# Altium PCB pcb.PcbDoc (part 3 of 9)
Units mil, origin at the board's own origin, x right, y up, seen from the top; angles counter-clockwise.
Board outline 3937.01 x 3937.01 mil, 4 copper layers (Top Layer, Ground plane, Power plane, Bottom Layer), stack 51.4 mil thick; 310 components, 276 nets, 1704 pads, 977 vias.
Unrouted connection lines stored in the file: 44.
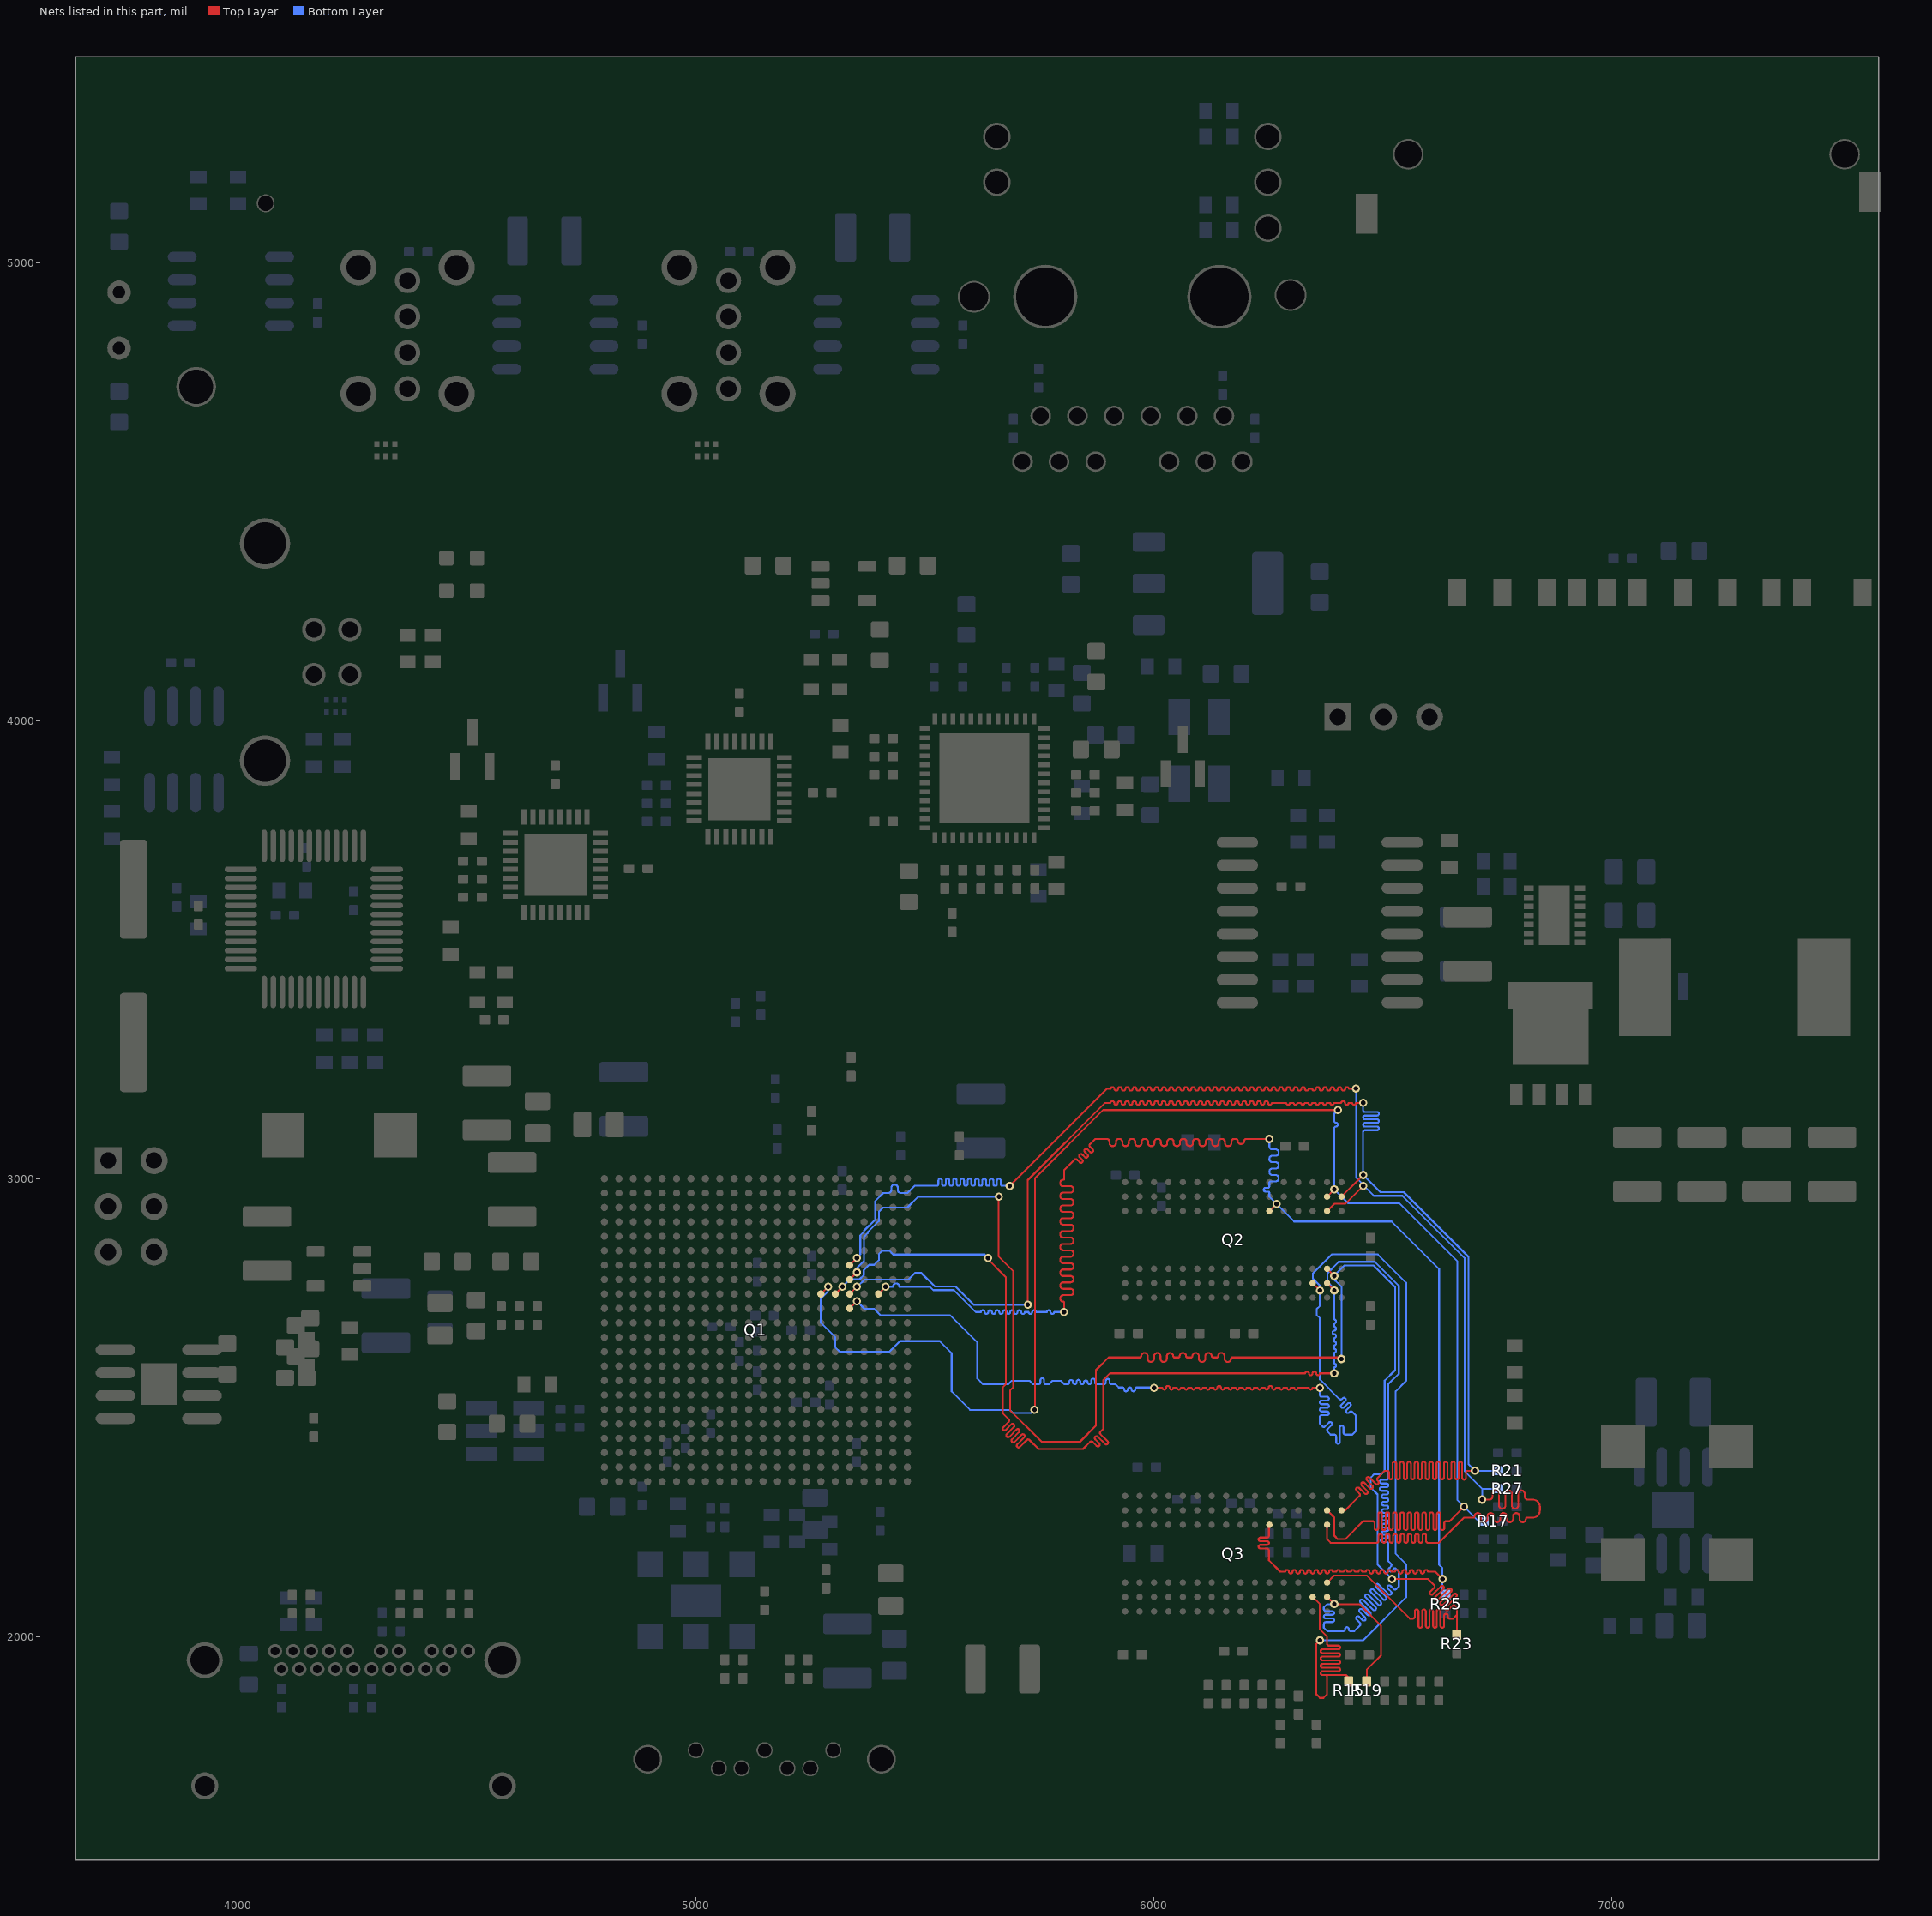
[diagram p4: the nets of this part, all layers, seen from the top]

## Via types
v1: diameter 18, hole 10, Top Layer to Bottom Layer, 932 vias
v2: diameter 19.68, hole 9.84, Top Layer to Bottom Layer, tented both sides, 18 vias
v3: diameter 19.68, hole 9.84, Top Layer to Bottom Layer, 16 vias
v4: diameter 19.68, hole 7.87, Top Layer to Bottom Layer, 11 vias

## Nets (pads, with @x,y where several pads share a name; then routed paths per layer and width w, separated by ;. In a path a pad name is that pad's centre, name@x,y a point inside that pad or via, vN(x,y) a via of type N, cw(c..) or ccw(c..) an arc to the next point about the centre after c; other vN are vias at no path point) (continued)
A5: Q1.K18 Q2.P2 Q3.P2 R15.1 | length 4159.4
  Top Layer w4: Q1.K18@5335.43,2716.54 v1(5351.18,2732.28) ; v1(6000,2543.31) 6018.2,2543.31 ccw(c6022.2,2543.31) 6026.2,2543.31 cw(c6030.2,2543.31) 6034.2,2543.31 ccw(c6038.2,2543.31) 6042.2,2543.31 6050.2,2543.31 ccw(c6054.2,2543.31) 6058.2,2543.31 6066.2,2543.31 ccw(c6070.2,2543.31) 6074.2,2543.31 6082.2,2543.31 ccw(c6086.2,2543.31) 6090.2,2543.31 6098.2,2543.31 ccw(c6102.2,2543.31) 6106.2,2543.31 6114.2,2543.31 ccw(c6118.2,2543.31) 6122.2,2543.31 6130.2,2543.31 ccw(c6134.2,2543.31) 6138.2,2543.31 cw(c6142.2,2543.31) 6146.2,2543.31 ccw(c6150.2,2543.31) 6154.2,2543.31 6162.2,2543.31 ccw(c6166.2,2543.31) 6170.2,2543.31 6178.2,2543.31 ccw(c6182.2,2543.31) 6186.2,2543.31 6194.2,2543.31 ccw(c6198.2,2543.31) 6202.2,2543.31 6210.2,2543.31 ccw(c6214.2,2543.31) 6218.2,2543.31 6226.2,2543.31 ccw(c6230.2,2543.31) 6234.2,2543.31 6242.2,2543.31 ccw(c6246.2,2543.31) 6250.2,2543.31 cw(c6254.2,2543.31) 6258.2,2543.31 ccw(c6262.2,2543.31) 6266.2,2543.31 6274.2,2543.31 ccw(c6278.2,2543.31) 6282.2,2543.31 6290.2,2543.31 ccw(c6294.2,2543.31) 6298.2,2543.31 6306.2,2543.31 ccw(c6310.2,2543.31) 6314.2,2543.31 6338.2,2543.31 ccw(c6342.2,2543.31) 6346.2,2543.31 v1(6362.2,2543.31) ; Q3.P2@6346.46,2086.61 6362.2,2070.87 6362.2,2015.75 6377.95,2000 6377.95,1984.25 ccw(c6381.95,1984.25) 6381.95,1980.25 6402.52,1980.25 cw(c6402.52,1976.25) 6406.52,1976.25 cw(c6402.52,1976.25) 6402.52,1972.25 6367.76,1972.25 ccw(c6367.76,1968.25) 6363.76,1968.25 ccw(c6367.76,1968.25) 6367.76,1964.25 6402.52,1964.25 cw(c6402.52,1960.25) 6406.52,1960.25 cw(c6402.52,1960.25) 6402.52,1956.25 6367.76,1956.25 ccw(c6367.76,1952.25) 6363.76,1952.25 ccw(c6367.76,1952.25) 6367.76,1948.25 6402.52,1948.25 cw(c6402.52,1944.25) 6406.52,1944.25 cw(c6402.52,1944.25) 6402.52,1940.25 6367.76,1940.25 ccw(c6367.76,1936.25) 6363.76,1936.25 ccw(c6367.76,1936.25) 6367.76,1932.25 6402.52,1932.25 cw(c6402.52,1928.25) 6406.52,1928.25 cw(c6402.52,1928.25) 6402.52,1924.25 6367.76,1924.25 ccw(c6367.76,1920.25) 6363.76,1920.25 ccw(c6367.76,1920.25) 6367.76,1916.25 6373.95,1916.25 ; Q2.P2@6346.46,2771.65 v1(6362.2,2755.91) ; v1(6362.2,1992.13) 6354.33,1984.25 6354.33,1874.02 6362.2,1866.14 6370.08,1866.14 6377.95,1874.02 6377.95,1912.25 ccw(c6373.95,1912.25) 6373.95,1916.25 ; R15.1@6433.07,1902.17 6418.98,1916.25 6373.95,1916.25
  Bottom Layer w4: v1(5351.18,2732.28) 5367.68,2715.79 5388.89,2715.79 5403.13,2701.54 5554.86,2701.54 5554.86,2701.28 ; 5555.12,2701.28 5614.05,2642.36 5614.05,2563.62 5626.61,2551.06 5681.45,2551.06 5689.2,2558.8 5728.13,2558.8 5735.88,2551.06 5748.03,2551.06 ccw(c5748.03,2555.06) 5752.03,2555.06 5752.03,2560.21 cw(c5756.03,2560.21) 5756.03,2564.21 cw(c5756.03,2560.21) 5760.03,2560.21 5760.03,2555.06 ccw(c5764.03,2555.06) 5764.03,2551.06 5770.5,2551.06 5777.87,2558.43 5796.93,2558.43 5804.31,2551.06 5811.02,2551.06 ccw(c5811.02,2555.06) 5815.02,2555.06 5815.02,2556.45 cw(c5819.02,2556.45) 5819.02,2560.45 cw(c5819.02,2556.45) 5823.02,2556.45 5823.02,2555.06 ccw(c5827.02,2555.06) 5827.02,2551.06 ccw(c5827.02,2555.06) 5831.02,2555.06 5831.02,2556.7 cw(c5835.02,2556.7) 5835.02,2560.7 cw(c5835.02,2556.7) 5839.02,2556.7 5839.02,2555.06 ccw(c5843.02,2555.06) 5843.02,2551.06 ccw(c5843.02,2555.06) 5847.02,2555.06 5847.02,2555.17 cw(c5851.02,2555.17) 5851.02,2559.17 cw(c5851.02,2555.17) 5855.02,2555.17 5855.02,2555.06 ccw(c5859.02,2555.06) 5859.02,2551.06 ccw(c5859.02,2555.06) 5863.02,2555.06 5863.02,2559.3 cw(c5867.02,2559.3) 5867.02,2563.3 cw(c5867.02,2559.3) 5871.02,2559.3 5871.02,2555.06 ccw(c5875.02,2555.06) 5875.02,2551.06 5891.02,2551.06 ccw(c5891.02,2555.06) 5895.02,2555.06 5895.02,2558.86 cw(c5899.02,2558.86) 5899.02,2562.86 cw(c5899.02,2558.86) 5903.02,2558.86 5903.02,2555.06 ccw(c5907.02,2555.06) 5907.02,2551.06 5915.92,2551.06 5922.92,2544.06 5930.92,2544.06 cw(c5930.92,2540.06) 5934.92,2540.06 5934.92,2539.56 ccw(c5938.92,2539.56) 5938.92,2535.56 ccw(c5938.92,2539.56) 5942.92,2539.56 5942.92,2540.06 cw(c5946.92,2540.06) 5946.92,2544.06 cw(c5946.92,2540.06) 5950.92,2540.06 5950.92,2539.56 ccw(c5954.92,2539.56) 5954.92,2535.56 ccw(c5954.92,2539.56) 5958.92,2539.56 5958.92,2540.06 cw(c5962.92,2540.06) 5962.92,2544.06 v1@5999.25,2544.06 ; v1(6362.2,1992.13) 6456.69,1992.13 6550.69,2086.12 6550.69,2157.98 6527.81,2180.85 6527.81,2535.68 6550.69,2558.56 6550.69,2772.73 6489.01,2834.4 6387.99,2834.4 6347.2,2793.61 6347.2,2781.19 6362.2,2766.19 v1(6362.2,2755.91) 6362.2,2722 6355.08,2714.87 6355.08,2702.45 6362.2,2695.32 6362.2,2561.46 6404.79,2518.88 ccw(c6407.62,2521.71) 6410.44,2518.88 6411.83,2520.27 cw(c6414.66,2517.44) 6417.49,2520.27 cw(c6414.66,2517.44) 6417.49,2514.61 6413.27,2510.4 6409.05,2506.18 ccw(c6411.88,2503.35) 6409.05,2500.52 ccw(c6411.88,2503.35) 6414.71,2500.52 6418.93,2504.74 6423.15,2508.96 cw(c6425.97,2506.13) 6428.8,2508.96 cw(c6425.97,2506.13) 6428.8,2503.3 6424.59,2499.08 6420.37,2494.87 ccw(c6423.2,2492.04) 6420.37,2489.21 ccw(c6423.2,2492.04) 6426.03,2489.21 6427.41,2490.6 cw(c6430.24,2487.77) 6433.07,2490.6 6440.94,2482.72 6440.94,2448.82 6433.07,2440.94 6417.83,2440.94 cw(c6417.83,2444.94) 6413.83,2444.94 6413.83,2456.8 ccw(c6409.83,2456.8) 6409.83,2460.8 ccw(c6409.83,2456.8) 6405.83,2456.8 6405.83,2425.09 cw(c6401.83,2425.09) 6401.83,2421.09 cw(c6401.83,2425.09) 6397.83,2425.09 6397.83,2436.94 ccw(c6393.83,2436.94) 6393.83,2440.94 6385.83,2440.94 6379.18,2447.6 cw(c6382,2450.42) 6379.18,2453.25 6387.56,2461.64 ccw(c6384.73,2464.47) 6387.56,2467.29 ccw(c6384.73,2464.47) 6381.9,2467.29 6373.52,2458.91 cw(c6370.69,2461.74) 6367.86,2458.91 6362.2,2464.57 6362.2,2479.56 cw(c6366.2,2479.56) 6366.2,2483.56 6378.06,2483.56 ccw(c6378.06,2487.56) 6382.06,2487.56 ccw(c6378.06,2487.56) 6378.06,2491.56 6366.2,2491.56 cw(c6366.2,2495.56) 6362.2,2495.56 cw(c6366.2,2495.56) 6366.2,2499.56 6378.06,2499.56 ccw(c6378.06,2503.56) 6382.06,2503.56 ccw(c6378.06,2503.56) 6378.06,2507.56 6366.2,2507.56 cw(c6366.2,2511.56) 6362.2,2511.56 cw(c6366.2,2511.56) 6366.2,2515.56 6378.06,2515.56 ccw(c6378.06,2519.56) 6382.06,2519.56 ccw(c6378.06,2519.56) 6378.06,2523.56 6366.2,2523.56 cw(c6366.2,2527.56) 6362.2,2527.56 v1(6362.2,2543.31)
A6: Q1.J16 Q2.R8 Q3.R8 R17.1 | length 4150.3
  Top Layer w4: Q1.J16@5272.44,2748.03 v1(5288.19,2763.78) ; v1(5739.15,2495.06) 5740.16,2496.06 5740.16,3000.99 5888.77,3149.61 v1(6401.57,3149.61) ; Q3.R8@6377.95,2275.59 6393.7,2259.84 6393.7,2220.47 6401.32,2212.85 6417.32,2212.85 6456.44,2251.97 6477.8,2251.97 cw(c6477.8,2247.97) 6481.8,2247.97 6481.8,2236.68 ccw(c6485.8,2236.68) 6485.8,2232.68 ccw(c6485.8,2236.68) 6489.8,2236.68 6489.8,2267.26 cw(c6493.8,2267.26) 6493.8,2271.26 cw(c6493.8,2267.26) 6497.8,2267.26 6497.8,2236.68 ccw(c6501.8,2236.68) 6501.8,2232.68 ccw(c6501.8,2236.68) 6505.8,2236.68 6505.8,2267.26 cw(c6509.8,2267.26) 6509.8,2271.26 cw(c6509.8,2267.26) 6513.8,2267.26 6513.8,2236.68 ccw(c6517.8,2236.68) 6517.8,2232.68 ccw(c6517.8,2236.68) 6521.8,2236.68 6521.8,2267.26 cw(c6525.8,2267.26) 6525.8,2271.26 cw(c6525.8,2267.26) 6529.8,2267.26 6529.8,2236.68 ccw(c6533.8,2236.68) 6533.8,2232.68 ccw(c6533.8,2236.68) 6537.8,2236.68 6537.8,2267.26 cw(c6541.8,2267.26) 6541.8,2271.26 cw(c6541.8,2267.26) 6545.8,2267.26 6545.8,2236.68 ccw(c6549.8,2236.68) 6549.8,2232.68 ccw(c6549.8,2236.68) 6553.8,2236.68 6553.8,2267.26 cw(c6557.8,2267.26) 6557.8,2271.26 cw(c6557.8,2267.26) 6561.8,2267.26 6561.8,2236.68 ccw(c6565.8,2236.68) 6565.8,2232.68 ccw(c6565.8,2236.68) 6569.8,2236.68 6569.8,2267.26 cw(c6573.8,2267.26) 6573.8,2271.26 cw(c6573.8,2267.26) 6577.8,2267.26 6577.8,2236.68 ccw(c6581.8,2236.68) 6581.8,2232.68 ccw(c6581.8,2236.68) 6585.8,2236.68 6585.8,2267.26 cw(c6589.8,2267.26) 6589.8,2271.26 cw(c6589.8,2267.26) 6593.8,2267.26 6593.8,2236.68 ccw(c6597.8,2236.68) 6597.8,2232.68 ccw(c6597.8,2236.68) 6601.8,2236.68 6601.8,2267.26 cw(c6605.8,2267.26) 6605.8,2271.26 cw(c6605.8,2267.26) 6609.8,2267.26 6609.8,2236.68 ccw(c6613.8,2236.68) 6613.8,2232.68 ccw(c6613.8,2236.68) 6617.8,2236.68 6617.8,2267.26 cw(c6621.8,2267.26) 6621.8,2271.26 cw(c6621.8,2267.26) 6625.8,2267.26 6625.8,2236.68 ccw(c6629.8,2236.68) 6629.8,2232.68 ccw(c6629.8,2236.68) 6633.8,2236.68 6633.8,2247.97 cw(c6637.8,2247.97) 6637.8,2251.97 6645.67,2251.97 v1(6677.17,2283.46) ; Q2.R8@6377.95,2960.63 v1(6393.7,2976.38)
  Bottom Layer w4: v1(5288.19,2763.78) 5288.19,2753.5 5272.44,2737.75 5272.44,2685.04 5304.13,2653.35 5304.13,2631.35 5313.43,2622.05 5422.05,2622.05 5445.17,2645.17 5532.04,2645.17 5558.05,2619.16 5558.05,2535.45 5598.44,2495.06 5685.02,2495.06 5691.88,2488.19 5732.28,2488.19 v1(5739.15,2495.06) ; v1(6401.57,3149.61) 6393.7,3141.73 6393.7,3125.98 ccw(c6397.7,3125.98) 6397.7,3121.98 cw(c6397.7,3117.98) 6401.7,3117.98 cw(c6397.7,3117.98) 6397.7,3113.98 ccw(c6397.7,3109.98) 6393.7,3109.98 v1(6393.7,2976.38) 6423.68,2946.4 6535.4,2946.4 6662.69,2819.12 6662.69,2297.95 v1(6677.17,2283.46) 6708.66,2251.97 R17.1@6719.88,2251.97
A7: Q1.J17 Q2.R2 Q3.R2 R19.1 | length 4350.9
  Top Layer w4: Q1.J17@5303.94,2748.03 v1(5319.69,2763.78) ; v1(5637.8,2826.77) 5637.8,2823.74 5676.66,2784.87 5676.66,2551.18 5669.66,2544.18 5669.66,2487.78 5682.79,2474.66 cw(c5679.96,2471.83) 5682.79,2469 5670.83,2457.05 ccw(c5673.66,2454.22) 5670.83,2451.39 ccw(c5673.66,2454.22) 5676.49,2451.39 5688.44,2463.34 cw(c5691.27,2460.52) 5694.1,2463.34 cw(c5691.27,2460.52) 5694.1,2457.69 5678.54,2442.13 ccw(c5681.37,2439.3) 5678.54,2436.47 ccw(c5681.37,2439.3) 5684.2,2436.47 5699.76,2452.03 cw(c5702.58,2449.2) 5705.41,2452.03 cw(c5702.58,2449.2) 5705.41,2446.37 5689.86,2430.82 ccw(c5692.69,2427.99) 5689.86,2425.16 ccw(c5692.69,2427.99) 5695.51,2425.16 5711.07,2440.72 cw(c5713.9,2437.89) 5716.73,2440.72 cw(c5713.9,2437.89) 5716.73,2435.06 5701.36,2419.69 ccw(c5704.19,2416.87) 5701.36,2414.04 ccw(c5704.19,2416.87) 5707.02,2414.04 5722.38,2429.4 cw(c5725.21,2426.57) 5728.04,2429.4 5747.87,2409.57 5845.09,2409.57 5860.48,2424.97 cw(c5863.31,2422.14) 5866.14,2424.97 5874.63,2416.48 ccw(c5877.46,2419.31) 5880.28,2416.48 ccw(c5877.46,2419.31) 5880.28,2422.14 5871.8,2430.63 cw(c5874.63,2433.45) 5871.8,2436.28 cw(c5874.63,2433.45) 5877.46,2436.28 5893.01,2420.73 ccw(c5895.84,2423.55) 5898.67,2420.73 ccw(c5895.84,2423.55) 5898.67,2426.38 5883.11,2441.94 cw(c5885.94,2444.77) 5883.11,2447.6 5889.27,2453.75 5889.27,2560.25 5903.82,2574.8 6330.2,2574.8 cw(c6334.2,2574.8) 6338.2,2574.8 ccw(c6342.2,2574.8) 6346.2,2574.8 cw(c6350.2,2574.8) 6354.2,2574.8 ccw(c6358.2,2574.8) 6362.2,2574.8 v1(6393.7,2574.8) ; Q3.R2@6377.95,2086.61 v1(6393.7,2070.87) 6448.82,2070.87 6496.06,2023.62 6496.06,1959.2 6464.57,1927.71 R19.1@6464.57,1902.17 ; Q2.R2@6377.95,2771.65 v1(6393.7,2755.91)
  Bottom Layer w4: v1(5319.69,2763.78) 5336.18,2780.28 5357.39,2780.28 5366.18,2789.06 5366.18,2799.99 5377.96,2811.77 5388.89,2811.77 5399.17,2822.05 5399.17,2835.39 5406.3,2842.52 5422.05,2842.52 5430.43,2834.14 5630.43,2834.14 v1(5637.8,2826.77) ; v1(6393.7,2070.87) 6377.95,2070.87 6370.86,2063.78 6370.86,2059.72 ccw(c6374.86,2059.72) 6374.86,2055.72 6389.32,2055.72 cw(c6389.32,2051.72) 6393.32,2051.72 cw(c6389.32,2051.72) 6389.32,2047.72 6374.86,2047.72 ccw(c6374.86,2043.72) 6370.86,2043.72 ccw(c6374.86,2043.72) 6374.86,2039.72 6389.32,2039.72 cw(c6389.32,2035.72) 6393.32,2035.72 cw(c6389.32,2035.72) 6389.32,2031.72 6374.86,2031.72 ccw(c6374.86,2027.72) 6370.86,2027.72 6370.86,2019.72 6378.46,2012.12 6413.32,2012.12 ccw(c6413.32,2016.12) 6417.32,2016.12 6417.32,2016.66 cw(c6421.32,2016.66) 6421.32,2020.66 cw(c6421.32,2016.66) 6425.32,2016.66 6425.32,2016.12 ccw(c6429.32,2016.12) 6429.32,2012.12 6437.32,2012.12 6449.83,2024.64 ccw(c6447,2027.46) 6449.83,2030.29 6442.42,2037.71 cw(c6445.25,2040.53) 6442.42,2043.36 cw(c6445.25,2040.53) 6448.08,2043.36 6455.49,2035.95 ccw(c6458.32,2038.78) 6461.15,2035.95 ccw(c6458.32,2038.78) 6461.15,2041.61 6449.2,2053.55 cw(c6452.03,2056.38) 6449.2,2059.21 cw(c6452.03,2056.38) 6454.86,2059.21 6466.8,2047.26 ccw(c6469.63,2050.09) 6472.46,2047.26 ccw(c6469.63,2050.09) 6472.46,2052.92 6451.01,2074.37 cw(c6453.84,2077.19) 6451.01,2080.02 cw(c6453.84,2077.19) 6456.67,2080.02 6478.12,2058.58 ccw(c6480.94,2061.4) 6483.77,2058.58 ccw(c6480.94,2061.4) 6483.77,2064.23 6462.39,2085.62 cw(c6465.21,2088.45) 6462.39,2091.28 cw(c6465.21,2088.45) 6468.04,2091.28 6489.43,2069.89 ccw(c6492.26,2072.72) 6495.09,2069.89 ccw(c6492.26,2072.72) 6495.09,2075.55 6473.7,2096.93 cw(c6476.53,2099.76) 6473.7,2102.59 cw(c6476.53,2099.76) 6479.36,2102.59 6500.74,2081.2 ccw(c6503.57,2084.03) 6506.4,2081.2 ccw(c6503.57,2084.03) 6506.4,2086.86 6485.01,2108.25 cw(c6487.84,2111.08) 6485.01,2113.91 cw(c6487.84,2111.08) 6490.67,2113.91 6512.06,2092.52 ccw(c6514.89,2095.35) 6517.71,2092.52 ccw(c6514.89,2095.35) 6517.71,2098.17 6510.71,2105.18 cw(c6513.54,2108.01) 6510.71,2110.84 cw(c6513.54,2108.01) 6516.37,2110.84 6523.37,2103.83 ccw(c6526.2,2106.66) 6529.03,2103.83 6534.69,2109.49 6534.69,2141.73 6527.56,2148.86 ccw(c6525.95,2147.25) 6524.35,2148.86 6519.06,2143.57 cw(c6516.23,2146.4) 6513.41,2143.57 cw(c6516.23,2146.4) 6513.41,2149.23 6517.47,2153.29 ccw(c6514.64,2156.12) 6517.47,2158.95 6511.81,2164.61 6511.81,2202.33 ccw(c6507.81,2202.33) 6507.81,2206.33 6499.23,2206.33 cw(c6499.23,2210.33) 6495.23,2210.33 cw(c6499.23,2210.33) 6499.23,2214.33 6507.81,2214.33 ccw(c6507.81,2218.33) 6511.81,2218.33 ccw(c6507.81,2218.33) 6507.81,2222.33 6501.45,2222.33 cw(c6501.45,2226.33) 6497.45,2226.33 cw(c6501.45,2226.33) 6501.45,2230.33 6507.81,2230.33 ccw(c6507.81,2234.33) 6511.81,2234.33 ccw(c6507.81,2234.33) 6507.81,2238.33 6501.45,2238.33 cw(c6501.45,2242.33) 6497.45,2242.33 cw(c6501.45,2242.33) 6501.45,2246.33 6507.81,2246.33 ccw(c6507.81,2250.33) 6511.81,2250.33 ccw(c6507.81,2250.33) 6507.81,2254.33 6501.45,2254.33 cw(c6501.45,2258.33) 6497.45,2258.33 cw(c6501.45,2258.33) 6501.45,2262.33 6507.81,2262.33 ccw(c6507.81,2266.33) 6511.81,2266.33 ccw(c6507.81,2266.33) 6507.81,2270.33 6501.45,2270.33 cw(c6501.45,2274.33) 6497.45,2274.33 cw(c6501.45,2274.33) 6501.45,2278.33 6507.81,2278.33 ccw(c6507.81,2282.33) 6511.81,2282.33 ccw(c6507.81,2282.33) 6507.81,2286.33 6501.45,2286.33 cw(c6501.45,2290.33) 6497.45,2290.33 cw(c6501.45,2290.33) 6501.45,2294.33 6507.81,2294.33 ccw(c6507.81,2298.33) 6511.81,2298.33 ccw(c6507.81,2298.33) 6507.81,2302.33 6501.45,2302.33 cw(c6501.45,2306.33) 6497.45,2306.33 cw(c6501.45,2306.33) 6501.45,2310.33 6507.81,2310.33 ccw(c6507.81,2314.33) 6511.81,2314.33 ccw(c6507.81,2314.33) 6507.81,2318.33 6497.07,2318.33 cw(c6497.07,2322.33) 6493.07,2322.33 cw(c6497.07,2322.33) 6497.07,2326.33 6507.81,2326.33 ccw(c6507.81,2330.33) 6511.81,2330.33 ccw(c6507.81,2330.33) 6507.81,2334.33 6497.07,2334.33 cw(c6497.07,2338.33) 6493.07,2338.33 cw(c6497.07,2338.33) 6497.07,2342.33 6507.81,2342.33 ccw(c6507.81,2346.33) 6511.81,2346.33 6511.81,2551.18 6534.69,2574.06 6534.69,2766.1 6482.38,2818.4 6403.49,2818.4 6378.7,2793.61 6378.7,2774.35 6393.7,2759.35 v1(6393.7,2755.91) 6393.7,2692.16 cw(c6393.7,2688.16) 6393.7,2684.16 6393.7,2676.16 cw(c6393.7,2672.16) 6393.7,2668.16 ccw(c6393.7,2664.16) 6393.7,2660.16 cw(c6393.7,2656.16) 6393.7,2652.16 6393.7,2644.16 cw(c6393.7,2640.16) 6393.7,2636.16 6393.7,2628.16 cw(c6393.7,2624.16) 6393.7,2620.16 6393.7,2596.16 cw(c6393.7,2592.16) 6393.7,2588.16 v1(6393.7,2574.8)
A8: Q1.J18 Q2.T8 Q3.T8 R21.1 | length 4178.5
  Top Layer w4: Q1.J18@5335.43,2748.03 v1(5351.18,2763.78) ; v1(5724.41,2724.41) 5724.41,2996.56 5893.2,3165.35 5905.07,3165.35 cw(c5909.07,3165.35) 5913.07,3165.35 ccw(c5917.07,3165.35) 5921.07,3165.35 cw(c5925.07,3165.35) 5929.07,3165.35 ccw(c5933.07,3165.35) 5937.07,3165.35 cw(c5941.07,3165.35) 5945.07,3165.35 ccw(c5949.07,3165.35) 5953.07,3165.35 cw(c5957.07,3165.35) 5961.07,3165.35 ccw(c5965.07,3165.35) 5969.07,3165.35 cw(c5973.07,3165.35) 5977.07,3165.35 ccw(c5981.07,3165.35) 5985.07,3165.35 cw(c5989.07,3165.35) 5993.07,3165.35 ccw(c5997.07,3165.35) 6001.07,3165.35 cw(c6005.07,3165.35) 6009.07,3165.35 ccw(c6013.07,3165.35) 6017.07,3165.35 cw(c6021.07,3165.35) 6025.07,3165.35 ccw(c6029.07,3165.35) 6033.07,3165.35 cw(c6037.07,3165.35) 6041.07,3165.35 ccw(c6045.07,3165.35) 6049.07,3165.35 cw(c6053.07,3165.35) 6057.07,3165.35 ccw(c6061.07,3165.35) 6065.07,3165.35 cw(c6069.07,3165.35) 6073.07,3165.35 ccw(c6077.07,3165.35) 6081.07,3165.35 cw(c6085.07,3165.35) 6089.07,3165.35 ccw(c6093.07,3165.35) 6097.07,3165.35 cw(c6101.07,3165.35) 6105.07,3165.35 ccw(c6109.07,3165.35) 6113.07,3165.35 cw(c6117.07,3165.35) 6121.07,3165.35 ccw(c6125.07,3165.35) 6129.07,3165.35 cw(c6133.07,3165.35) 6137.07,3165.35 ccw(c6141.07,3165.35) 6145.07,3165.35 cw(c6149.07,3165.35) 6153.07,3165.35 ccw(c6157.07,3165.35) 6161.07,3165.35 cw(c6165.07,3165.35) 6169.07,3165.35 ccw(c6173.07,3165.35) 6177.07,3165.35 cw(c6181.07,3165.35) 6185.07,3165.35 ccw(c6189.07,3165.35) 6193.07,3165.35 cw(c6197.07,3165.35) 6201.07,3165.35 ccw(c6205.07,3165.35) 6209.07,3165.35 cw(c6213.07,3165.35) 6217.07,3165.35 ccw(c6221.07,3165.35) 6225.07,3165.35 cw(c6229.07,3165.35) 6233.07,3165.35 ccw(c6237.07,3165.35) 6241.07,3165.35 cw(c6245.07,3165.35) 6249.07,3165.35 ccw(c6253.07,3165.35) 6257.07,3165.35 6288.94,3165.35 ccw(c6292.94,3165.35) 6296.94,3165.35 6304.94,3165.35 ccw(c6308.94,3165.35) 6312.94,3165.35 6320.94,3165.35 ccw(c6324.94,3165.35) 6328.94,3165.35 6336.94,3165.35 ccw(c6340.94,3165.35) 6344.94,3165.35 6352.94,3165.35 ccw(c6356.94,3165.35) 6360.94,3165.35 6368.94,3165.35 ccw(c6372.94,3165.35) 6376.94,3165.35 6384.94,3165.35 ccw(c6388.94,3165.35) 6392.94,3165.35 6408.94,3165.35 cw(c6412.94,3165.35) 6416.94,3165.35 ccw(c6420.94,3165.35) 6424.94,3165.35 6432.94,3165.35 ccw(c6436.94,3165.35) 6440.94,3165.35 v1(6456.69,3165.35) ; Q3.T8@6409.45,2275.59 6417.32,2275.59 6448.59,2306.86 ccw(c6445.76,2309.69) 6448.59,2312.52 6442.26,2318.84 cw(c6445.09,2321.67) 6442.26,2324.5 cw(c6445.09,2321.67) 6447.92,2324.5 6459.9,2312.52 ccw(c6462.73,2315.34) 6465.56,2312.52 ccw(c6462.73,2315.34) 6465.56,2318.17 6462.73,2321 6453.58,2330.16 cw(c6456.4,2332.99) 6453.58,2335.81 cw(c6456.4,2332.99) 6459.23,2335.81 6468.39,2326.66 6471.22,2323.83 ccw(c6474.05,2326.66) 6476.88,2323.83 ccw(c6474.05,2326.66) 6476.88,2329.49 6474.05,2332.31 6464.89,2341.47 cw(c6467.72,2344.3) 6464.89,2347.13 cw(c6467.72,2344.3) 6470.55,2347.13 6479.7,2337.97 6484.01,2333.66 ccw(c6486.84,2336.49) 6489.67,2333.66 ccw(c6486.84,2336.49) 6489.67,2339.32 6488.19,2340.8 cw(c6491.02,2343.63) 6488.19,2346.46 6503.94,2362.2 6509.04,2362.2 cw(c6509.04,2358.2) 6513.04,2358.2 6513.04,2347.5 ccw(c6517.04,2347.5) 6517.04,2343.5 ccw(c6517.04,2347.5) 6521.04,2347.5 6521.04,2377.64 cw(c6525.04,2377.64) 6525.04,2381.64 cw(c6525.04,2377.64) 6529.04,2377.64 6529.04,2347.5 ccw(c6533.04,2347.5) 6533.04,2343.5 ccw(c6533.04,2347.5) 6537.04,2347.5 6537.04,2377.64 cw(c6541.04,2377.64) 6541.04,2381.64 cw(c6541.04,2377.64) 6545.04,2377.64 6545.04,2347.5 ccw(c6549.04,2347.5) 6549.04,2343.5 ccw(c6549.04,2347.5) 6553.04,2347.5 6553.04,2377.64 cw(c6557.04,2377.64) 6557.04,2381.64 cw(c6557.04,2377.64) 6561.04,2377.64 6561.04,2347.5 ccw(c6565.04,2347.5) 6565.04,2343.5 ccw(c6565.04,2347.5) 6569.04,2347.5 6569.04,2377.64 cw(c6573.04,2377.64) 6573.04,2381.64 cw(c6573.04,2377.64) 6577.04,2377.64 6577.04,2347.5 ccw(c6581.04,2347.5) 6581.04,2343.5 ccw(c6581.04,2347.5) 6585.04,2347.5 6585.04,2377.64 cw(c6589.04,2377.64) 6589.04,2381.64 cw(c6589.04,2377.64) 6593.04,2377.64 6593.04,2347.5 ccw(c6597.04,2347.5) 6597.04,2343.5 ccw(c6597.04,2347.5) 6601.04,2347.5 6601.04,2377.64 cw(c6605.04,2377.64) 6605.04,2381.64 cw(c6605.04,2377.64) 6609.04,2377.64 6609.04,2347.5 ccw(c6613.04,2347.5) 6613.04,2343.5 ccw(c6613.04,2347.5) 6617.04,2347.5 6617.04,2377.64 cw(c6621.04,2377.64) 6621.04,2381.64 cw(c6621.04,2377.64) 6625.04,2377.64 6625.04,2347.5 ccw(c6629.04,2347.5) 6629.04,2343.5 ccw(c6629.04,2347.5) 6633.04,2347.5 6633.04,2377.64 cw(c6637.04,2377.64) 6637.04,2381.64 cw(c6637.04,2377.64) 6641.04,2377.64 6641.04,2347.5 ccw(c6645.04,2347.5) 6645.04,2343.5 ccw(c6645.04,2347.5) 6649.04,2347.5 6649.04,2377.64 cw(c6653.04,2377.64) 6653.04,2381.64 cw(c6653.04,2377.64) 6657.04,2377.64 6657.04,2347.5 ccw(c6661.04,2347.5) 6661.04,2343.5 ccw(c6661.04,2347.5) 6665.04,2347.5 6665.04,2377.64 cw(c6669.04,2377.64) 6669.04,2381.64 cw(c6669.04,2377.64) 6673.04,2377.64 6673.04,2346.77 ccw(c6677.04,2346.77) 6677.04,2342.77 ccw(c6677.04,2346.77) 6681.04,2346.77 6681.04,2358.2 cw(c6685.04,2358.2) 6685.04,2362.2 v1(6700.79,2362.2) ; Q2.T8@6409.45,2960.63 6448.82,3000 v1(6456.69,3007.87)
  Bottom Layer w4: v1(5351.18,2763.78) 5352.21,2763.78 5367.96,2779.53 5463.83,2779.53 5478.83,2794.53 5491.25,2794.53 5521.38,2764.4 5566.31,2764.4 5606.3,2724.41 v1(5724.41,2724.41) ; v1(6456.69,3165.35) 6456.69,3149.61 ccw(c6460.69,3149.61) 6460.69,3145.61 6487.03,3145.61 cw(c6487.03,3141.61) 6491.03,3141.61 cw(c6487.03,3141.61) 6487.03,3137.61 6460.69,3137.61 ccw(c6460.69,3133.61) 6456.69,3133.61 ccw(c6460.69,3133.61) 6460.69,3129.61 6487.03,3129.61 cw(c6487.03,3125.61) 6491.03,3125.61 cw(c6487.03,3125.61) 6487.03,3121.61 6460.69,3121.61 ccw(c6460.69,3117.61) 6456.69,3117.61 ccw(c6460.69,3117.61) 6460.69,3113.61 6487.03,3113.61 cw(c6487.03,3109.61) 6491.03,3109.61 cw(c6487.03,3109.61) 6487.03,3105.61 6460.69,3105.61 ccw(c6460.69,3101.61) 6456.69,3101.61 v1(6456.69,3007.87) 6494.17,2970.4 6545.34,2970.4 6686.69,2829.06 6686.69,2376.31 v1(6700.79,2362.2) R21.1@6751.38,2362.2
A9: Q1.H18 Q2.R3 Q3.R3 R23.1 | length 4136.7
  Top Layer w4: Q1.H18@5335.43,2779.53 v1(5351.18,2795.28) ; v1(5661.42,2960.63) 5660.8,2960.01 5660.8,2829.8 5692.66,2797.94 5692.66,2544.55 5685.66,2537.55 5685.66,2494.41 5754.5,2425.57 5838.46,2425.57 5873.27,2460.38 5873.27,2581.8 5900.94,2609.48 5969.01,2609.48 ccw(c5969.01,2612.48) 5972.01,2612.48 cw(c5979.01,2612.48) 5979.01,2619.48 cw(c5979.01,2612.48) 5986.01,2612.48 5986.01,2606.68 ccw(c5993.01,2606.68) 5993.01,2599.68 ccw(c5993.01,2606.68) 6000.01,2606.68 6000.01,2612.28 cw(c6007.01,2612.28) 6007.01,2619.28 cw(c6007.01,2612.28) 6014.01,2612.28 6014.01,2606.68 ccw(c6021.01,2606.68) 6021.01,2599.68 ccw(c6021.01,2606.68) 6028.01,2606.68 6028.01,2612.28 cw(c6035.01,2612.28) 6035.01,2619.28 cw(c6035.01,2612.28) 6042.01,2612.28 ; 6042.01,2612.48 ccw(c6045.01,2612.48) 6045.01,2609.48 6053.01,2609.48 ccw(c6053.01,2612.48) 6056.01,2612.48 cw(c6063.01,2612.48) 6063.01,2619.48 cw(c6063.01,2612.48) 6070.01,2612.48 ccw(c6073.01,2612.48) 6073.01,2609.48 6081.01,2609.48 ccw(c6081.01,2612.48) 6084.01,2612.48 cw(c6091.01,2612.48) 6091.01,2619.48 cw(c6091.01,2612.48) 6098.01,2612.48 6098.01,2606.68 ccw(c6105.01,2606.68) 6105.01,2599.68 ccw(c6105.01,2606.68) 6112.01,2606.68 6112.01,2612.28 cw(c6119.01,2612.28) 6119.01,2619.28 cw(c6119.01,2612.28) 6126.01,2612.38 ; 6126.01,2612.28 ccw(c6119.01,2612.28) 6126.01,2612.38 ; 6126.01,2612.48 ccw(c6129.01,2612.48) 6126.01,2612.38 ; 6168.01,2606.48 cw(c6171.01,2606.48) 6168.01,2606.58 ; 6168.01,2606.68 cw(c6161.01,2606.68) 6168.01,2606.58 ; Q3.R3@6377.95,2118.11 6393.58,2133.73 ; Q2.R3@6377.95,2803.15 v1(6393.7,2787.4) ; 6393.7,2133.73 6464.69,2133.73 6559.06,2039.37 6565.54,2039.37 ccw(c6565.54,2043.37) 6569.54,2043.37 6569.54,2055.36 cw(c6573.54,2055.36) 6573.54,2059.36 cw(c6573.54,2055.36) 6577.54,2055.36 6577.54,2023.38 ccw(c6581.54,2023.38) 6581.54,2019.38 ccw(c6581.54,2023.38) 6585.54,2023.38 6585.54,2055.36 cw(c6589.54,2055.36) 6589.54,2059.36 cw(c6589.54,2055.36) 6593.54,2055.36 6593.54,2023.38 ccw(c6597.54,2023.38) 6597.54,2019.38 ccw(c6597.54,2023.38) 6601.54,2023.38 6601.54,2055.36 cw(c6605.54,2055.36) 6605.54,2059.36 cw(c6605.54,2055.36) 6609.54,2055.36 6609.54,2023.38 ccw(c6613.54,2023.38) 6613.54,2019.38 ccw(c6613.54,2023.38) 6617.54,2023.38 6617.54,2055.36 cw(c6621.54,2055.36) 6621.54,2059.36 cw(c6621.54,2055.36) 6625.54,2055.36 6625.54,2023.38 ccw(c6629.54,2023.38) 6629.54,2019.38 ccw(c6629.54,2023.38) 6633.54,2023.38 6633.54,2045.76 cw(c6637.54,2045.76) 6637.54,2049.76 cw(c6637.54,2045.76) 6641.54,2045.76 6641.54,2043.37 ccw(c6645.54,2043.37) 6645.54,2039.37 6653.54,2039.37 6661.42,2047.24 ; v1(6409.45,2606.3) 6406.27,2609.48 6171.01,2609.48 ccw(c6171.01,2606.48) 6168.01,2606.58 ; v1(6519.69,2125.98) 6598.43,2125.98 6611.96,2112.45 cw(c6609.13,2109.62) 6611.96,2106.8 6603.48,2098.32 ccw(c6606.31,2095.49) 6603.48,2092.66 ccw(c6606.31,2095.49) 6609.14,2092.66 6626.29,2109.82 cw(c6629.12,2106.99) 6631.95,2109.82 cw(c6629.12,2106.99) 6631.95,2104.16 6614.79,2087.01 ccw(c6617.62,2084.18) 6614.79,2081.35 ccw(c6617.62,2084.18) 6620.45,2081.35 6631.76,2092.65 6643.06,2103.96 cw(c6645.89,2101.13) 6648.72,2103.96 cw(c6645.89,2101.13) 6648.72,2098.3 6626.11,2075.69 ccw(c6628.94,2072.87) 6626.11,2070.04 ccw(c6628.94,2072.87) 6631.76,2070.04 6643.07,2081.34 6654.37,2092.64 cw(c6657.2,2089.82) 6660.03,2092.64 cw(c6657.2,2089.82) 6660.03,2086.99 6637.42,2064.38 ccw(c6640.25,2061.55) 6637.42,2058.72 ccw(c6640.25,2061.55) 6643.08,2058.72 6651.55,2067.2 cw(c6654.38,2064.37) 6657.21,2067.2 6661.42,2062.99 6661.42,2047.24 ; R23.1@6661.42,2004.53 6661.42,2047.24 ; 6126.01,2612.38 ccw(c6129.01,2612.48) 6129.01,2609.48 6137.01,2609.48 ccw(c6137.01,2612.48) 6140.01,2612.48 cw(c6147.01,2612.48) 6147.01,2619.48 cw(c6147.01,2612.48) 6154.01,2612.48 6154.01,2606.68 ccw(c6161.01,2606.68) 6161.01,2599.68 ccw(c6161.01,2606.68) 6168.01,2606.58
  Bottom Layer w4: v1(5351.18,2795.28) 5351.18,2804.77 5366.74,2820.33 5366.74,2872.8 5374.68,2880.73 5374.68,2882.79 5399.17,2907.29 5399.17,2927.47 5408.52,2936.82 5461.23,2936.82 5484.91,2960.5 5661.29,2960.5 v1(5661.42,2960.63) ; v1(6409.45,2606.3) 6409.45,2763.78 6401.57,2771.65 6393.7,2779.53 v1(6393.7,2787.4) 6393.7,2788.43 6415.67,2810.4 6479.07,2810.4 6526.69,2762.78 6526.69,2581.8 6503.81,2558.93 6503.81,2362.2 6495.94,2354.33 6480.31,2354.33 6473.48,2347.5 6473.48,2324.98 6488.19,2310.27 6488.19,2157.48 v1(6519.69,2125.98)
A10: Q1.J20 Q2.L7 Q3.L7 R25.1 | length 4132.6
  Top Layer w4: Q1.J20@5398.43,2748.03 v1(5414.17,2763.78) ; v1@5804.14,2709.66 5804.14,2728.97 ccw(c5801.7,2728.97) 5801.7,2731.41 cw(c5801.7,2737.71) 5795.4,2737.71 5795.4,2739.11 cw(c5801.7,2739.11) 5801.7,2745.41 5817.84,2745.41 ccw(c5817.84,2751.71) 5824.14,2751.71 5824.14,2753.11 ccw(c5817.84,2753.11) 5817.84,2759.41 5801.7,2759.41 cw(c5801.7,2765.71) 5795.4,2765.71 5795.4,2767.11 cw(c5801.7,2767.11) 5801.7,2773.41 5817.84,2773.41 ccw(c5817.84,2779.71) 5824.14,2779.71 5824.14,2781.11 ccw(c5817.84,2781.11) 5817.84,2787.41 5801.7,2787.41 cw(c5801.7,2793.71) 5795.4,2793.71 5795.4,2795.11 cw(c5801.7,2795.11) 5801.7,2801.41 5817.84,2801.41 ccw(c5817.84,2807.71) 5824.14,2807.71 5824.14,2809.11 ccw(c5817.84,2809.11) 5817.84,2815.41 5801.7,2815.41 cw(c5801.7,2821.71) 5795.4,2821.71 5795.4,2823.11 cw(c5801.7,2823.11) 5801.7,2829.41 5817.84,2829.41 ccw(c5817.84,2835.71) 5824.14,2835.71 5824.14,2837.11 ccw(c5817.84,2837.11) 5817.84,2843.41 5801.7,2843.41 cw(c5801.7,2849.71) 5795.4,2849.71 5795.4,2851.11 cw(c5801.7,2851.11) 5801.7,2857.41 5817.84,2857.41 ccw(c5817.84,2863.71) 5824.14,2863.71 5824.14,2865.11 ccw(c5817.84,2865.11) 5817.84,2871.41 5801.7,2871.41 cw(c5801.7,2877.71) 5795.4,2877.71 5795.4,2879.11 cw(c5801.7,2879.11) 5801.7,2885.41 5817.84,2885.41 ccw(c5817.84,2891.71) 5824.14,2891.71 5824.14,2893.11 ccw(c5817.84,2893.11) 5817.84,2899.41 5801.7,2899.41 cw(c5801.7,2905.71) 5795.4,2905.71 5795.4,2907.11 cw(c5801.7,2907.11) 5801.7,2913.41 5817.84,2913.41 ccw(c5817.84,2919.71) 5824.14,2919.71 5824.14,2921.11 ccw(c5817.84,2921.11) 5817.84,2927.41 5801.7,2927.41 cw(c5801.7,2933.71) 5795.4,2933.71 5795.4,2935.11 cw(c5801.7,2935.11) 5801.7,2941.41 5817.84,2941.41 ccw(c5817.84,2947.71) 5824.14,2947.71 5824.14,2949.11 ccw(c5817.84,2949.11) 5817.84,2955.41 5801.7,2955.41 cw(c5801.7,2961.71) 5795.4,2961.71 5795.4,2963.11 cw(c5801.7,2963.11) 5801.7,2969.41 5817.84,2969.41 ccw(c5817.84,2975.71) 5824.14,2975.71 5824.14,2977.11 ccw(c5817.84,2977.11) 5817.84,2983.41 5801.7,2983.41 cw(c5801.7,2989.71) 5795.4,2989.71 5795.4,2991.11 cw(c5801.7,2991.11) 5801.7,2997.41 ccw(c5801.7,2999.85) 5804.14,2999.85 5804.14,3019.19 5826.32,3041.36 cw(c5829.14,3038.53) 5831.97,3041.36 5837.78,3035.55 ccw(c5840.61,3038.38) 5843.44,3035.55 ccw(c5840.61,3038.38) 5843.44,3041.21 5837.63,3047.02 cw(c5840.46,3049.84) 5837.63,3052.67 cw(c5840.46,3049.84) 5843.29,3052.67 5849.1,3046.86 ccw(c5851.92,3049.69) 5854.75,3046.86 ccw(c5851.92,3049.69) 5854.75,3052.52 5848.94,3058.33 cw(c5851.77,3061.16) 5848.94,3063.99 cw(c5851.77,3061.16) 5854.6,3063.99 5860.41,3058.18 ccw(c5863.24,3061.01) 5866.07,3058.18 ccw(c5863.24,3061.01) 5866.07,3063.84 5860.26,3069.64 cw(c5863.09,3072.47) 5860.26,3075.3 5871.57,3086.61 5896.59,3086.61 cw(c5896.59,3080.31) 5902.89,3080.31 5902.89,3077.42 ccw(c5909.19,3077.42) 5909.19,3071.12 5910.59,3071.12 ccw(c5910.59,3077.42) 5916.89,3077.42 5916.89,3080.31 cw(c5923.19,3080.31) 5923.19,3086.61 5924.59,3086.61 cw(c5924.59,3080.31) 5930.89,3080.31 5930.89,3077.42 ccw(c5937.19,3077.42) 5937.19,3071.12 5938.59,3071.12 ccw(c5938.59,3077.42) 5944.89,3077.42 5944.89,3080.31 cw(c5951.19,3080.31) 5951.19,3086.61 5952.59,3086.61 cw(c5952.59,3080.31) 5958.89,3080.31 5958.89,3077.42 ccw(c5965.19,3077.42) 5965.19,3071.12 5966.59,3071.12 ccw(c5966.59,3077.42) 5972.89,3077.42 5972.89,3080.31 cw(c5979.19,3080.31) 5979.19,3086.61 5980.59,3086.61 cw(c5980.59,3080.31) 5986.89,3080.31 5986.89,3077.42 ccw(c5993.19,3077.42) 5993.19,3071.12 5994.59,3071.12 ccw(c5994.59,3077.42) 6000.89,3077.42 6000.89,3080.31 cw(c6007.19,3080.31) 6007.19,3086.61 6008.59,3086.61 cw(c6008.59,3080.31) 6014.89,3080.31 6014.89,3077.42 ccw(c6021.19,3077.42) 6021.19,3071.12 6022.59,3071.12 ccw(c6022.59,3077.42) 6028.89,3077.42 6028.89,3080.31 cw(c6035.19,3080.31) 6035.19,3086.61 6036.59,3086.61 cw(c6036.59,3080.31) 6042.89,3080.31 6042.89,3077.42 ccw(c6049.19,3077.42) 6049.19,3071.12 6050.59,3071.12 ccw(c6050.59,3077.42) 6056.89,3077.42 6056.89,3080.31 cw(c6063.19,3080.31) 6063.19,3086.61 6064.59,3086.61 cw(c6064.59,3080.31) 6070.89,3080.31 6070.89,3077.42 ccw(c6077.19,3077.42) 6077.19,3071.12 6078.59,3071.12 ccw(c6078.59,3077.42) 6084.89,3077.42 6084.89,3080.31 cw(c6091.19,3080.31) 6091.19,3086.61 6092.59,3086.61 cw(c6092.59,3080.31) 6098.89,3080.31 6098.89,3077.42 ccw(c6105.19,3077.42) 6105.19,3071.12 6106.59,3071.12 ccw(c6106.59,3077.42) 6112.89,3077.42 6112.89,3080.31 cw(c6119.19,3080.31) 6119.19,3086.61 6120.59,3086.61 cw(c6120.59,3080.31) 6126.89,3080.31 6126.89,3077.42 ccw(c6133.19,3077.42) 6133.19,3071.12 6134.59,3071.12 ccw(c6134.59,3077.42) 6140.89,3077.42 6140.89,3080.31 cw(c6147.19,3080.31) 6147.19,3086.61 6148.59,3086.61 cw(c6148.59,3080.31) 6154.89,3080.31 6154.89,3077.42 ccw(c6161.19,3077.42) 6161.19,3071.12 6162.59,3071.12 ccw(c6162.59,3077.42) 6168.89,3077.42 6168.89,3080.31 cw(c6175.19,3080.31) 6175.19,3086.61 6178.3,3086.61 cw(c6178.3,3082.02) 6182.89,3082.02 ccw(c6189.19,3082.02) 6189.19,3075.72 6190.59,3075.72 ccw(c6190.59,3082.02) 6196.89,3082.02 cw(c6201.48,3082.02) 6201.48,3086.61 v1(6251.97,3086.61) ; Q3.L7@6251.97,2244.09 6250.98,2243.1 6250.98,2220.35 cw(c6246.98,2220.35) 6246.98,2216.35 6232.34,2216.35 ccw(c6232.34,2212.35) 6228.34,2212.35 ccw(c6232.34,2212.35) 6232.34,2208.35 6246.98,2208.35 cw(c6246.98,2204.35) 6250.98,2204.35 cw(c6246.98,2204.35) 6246.98,2200.35 6232.34,2200.35 ccw(c6232.34,2196.35) 6228.34,2196.35 ccw(c6232.34,2196.35) 6232.34,2192.35 6246.98,2192.35 cw(c6246.98,2188.35) 6250.98,2188.35 6250.98,2166.34 6275.59,2141.73 6286.43,2141.73 cw(c6290.43,2141.73) 6294.43,2141.73 ccw(c6298.43,2141.73) 6302.43,2141.73 cw(c6306.43,2141.73) 6310.43,2141.73 ccw(c6314.43,2141.73) 6318.43,2141.73 cw(c6322.43,2141.73) 6326.43,2141.73 ccw(c6330.43,2141.73) 6334.43,2141.73 cw(c6338.43,2141.73) 6342.43,2141.73 ccw(c6346.43,2141.73) 6350.43,2141.73 cw(c6354.43,2141.73) 6358.43,2141.73 ccw(c6362.43,2141.73) 6366.43,2141.73 cw(c6370.43,2141.73) 6374.43,2141.73 ccw(c6378.43,2141.73) 6382.43,2141.73 cw(c6386.43,2141.73) 6390.43,2141.73 6398.43,2141.73 cw(c6402.43,2141.73) 6406.43,2141.73 6414.43,2141.73 cw(c6418.43,2141.73) 6422.43,2141.73 6430.43,2141.73 cw(c6434.43,2141.73) 6438.43,2141.73 6446.43,2141.73 cw(c6450.43,2141.73) 6454.43,2141.73 6462.43,2141.73 cw(c6466.43,2141.73) 6470.43,2141.73 ccw(c6474.43,2141.73) 6478.43,2141.73 cw(c6482.43,2141.73) 6486.43,2141.73 ccw(c6490.43,2141.73) 6494.43,2141.73 cw(c6498.43,2141.73) 6502.43,2141.73 ccw(c6506.43,2141.73) 6510.43,2141.73 cw(c6514.43,2141.73) 6518.43,2141.73 6526.43,2141.73 cw(c6530.43,2141.73) 6534.43,2141.73 ccw(c6538.43,2141.73) 6542.43,2141.73 cw(c6546.43,2141.73) 6550.43,2141.73 ccw(c6554.43,2141.73) 6558.43,2141.73 cw(c6562.43,2141.73) 6566.43,2141.73 ccw(c6570.43,2141.73) 6574.43,2141.73 cw(c6578.43,2141.73) 6582.43,2141.73 ccw(c6586.43,2141.73) 6590.43,2141.73 cw(c6594.43,2141.73) 6598.43,2141.73 6614.17,2141.73 v1(6629.92,2125.98) ; Q2.L7@6251.97,2929.13 v1(6267.72,2944.88)
  Bottom Layer w4: v1(5414.17,2763.78) 5414.43,2764.03 5429.92,2764.03 cw(c5436.92,2764.03) 5443.92,2764.03 5510.43,2764.03 5518.06,2756.4 5562.99,2756.4 5610.73,2708.66 5622.05,2708.66 cw(c5626.05,2708.66) 5630.05,2708.66 ccw(c5634.05,2708.66) 5638.05,2708.66 cw(c5642.05,2708.66) 5646.05,2708.66 ccw(c5650.05,2708.66) 5654.05,2708.66 cw(c5658.05,2708.66) 5662.05,2708.66 ccw(c5666.05,2708.66) 5670.05,2708.66 cw(c5674.05,2708.66) 5678.05,2708.66 ccw(c5682.05,2708.66) 5686.05,2708.66 cw(c5690.05,2708.66) 5694.05,2708.66 ccw(c5698.05,2708.66) 5702.05,2708.66 cw(c5706.05,2708.66) 5710.05,2708.66 ccw(c5714.05,2708.66) 5718.05,2708.66 5726.05,2708.66 ccw(c5730.05,2708.66) 5734.05,2708.66 cw(c5738.05,2708.66) 5742.05,2708.66 5766.05,2708.66 cw(c5770.05,2708.66) 5774.05,2708.66 ccw(c5778.05,2708.66) 5782.05,2708.66 v1(5803.15,2708.66) ; v1(6251.97,3086.61) 6251.97,3070.17 ccw(c6258.27,3070.17) 6258.27,3063.87 6265.67,3063.87 cw(c6265.67,3057.57) 6271.97,3057.57 6271.97,3056.17 cw(c6265.67,3056.17) 6265.67,3049.87 6258.27,3049.87 ccw(c6258.27,3043.57) 6251.97,3043.57 6251.97,3042.17 ccw(c6258.27,3042.17) 6258.27,3035.87 6265.67,3035.87 cw(c6265.67,3029.57) 6271.97,3029.57 6271.97,3028.17 cw(c6265.67,3028.17) 6265.67,3021.87 6258.27,3021.87 ccw(c6258.27,3015.57) 6251.97,3015.57 6251.97,3014.17 ccw(c6258.27,3014.17) 6258.27,3007.87 6265.67,3007.87 cw(c6265.67,3001.57) 6271.97,3001.57 6271.97,3000.17 cw(c6265.67,3000.17) 6265.67,2993.87 6254.15,2993.87 6251.97,2991.68 6251.97,2983.68 cw(c6247.97,2983.68) 6247.97,2979.68 6243.42,2979.68 ccw(c6243.42,2975.68) 6239.42,2975.68 ccw(c6243.42,2975.68) 6243.42,2971.68 6248.79,2971.68 cw(c6248.79,2968.5) 6251.97,2968.5 6251.97,2960.63 v1(6267.72,2944.88) 6306.2,2906.4 6518.83,2906.4 6622.69,2802.55 6622.69,2156.84 6629.92,2149.61 v1(6629.92,2125.98) 6629.92,2099.02 R25.1@6637.8,2091.14
A11: Q1.G18 Q2.R7 Q3.R7 R27.1 | length 4208.3
  Top Layer w4: Q1.G18@5335.43,2811.02 v1(5351.18,2826.77) ; v1(5685.04,2984.25) 5896.89,3196.1 5905.51,3196.1 cw(c5909.51,3196.1) 5913.51,3196.1 ccw(c5917.51,3196.1) 5921.51,3196.1 cw(c5925.51,3196.1) 5929.51,3196.1 ccw(c5933.51,3196.1) 5937.51,3196.1 cw(c5941.51,3196.1) 5945.51,3196.1 ccw(c5949.51,3196.1) 5953.51,3196.1 cw(c5957.51,3196.1) 5961.51,3196.1 ccw(c5965.51,3196.1) 5969.51,3196.1 cw(c5973.51,3196.1) 5977.51,3196.1 ccw(c5981.51,3196.1) 5985.51,3196.1 cw(c5989.51,3196.1) 5993.51,3196.1 ccw(c5997.51,3196.1) 6001.51,3196.1 cw(c6005.51,3196.1) 6009.51,3196.1 ccw(c6013.51,3196.1) 6017.51,3196.1 cw(c6021.51,3196.1) 6025.51,3196.1 ccw(c6029.51,3196.1) 6033.51,3196.1 cw(c6037.51,3196.1) 6041.51,3196.1 ccw(c6045.51,3196.1) 6049.51,3196.1 cw(c6053.51,3196.1) 6057.51,3196.1 ccw(c6061.51,3196.1) 6065.51,3196.1 cw(c6069.51,3196.1) 6073.51,3196.1 ccw(c6077.51,3196.1) 6081.51,3196.1 cw(c6085.51,3196.1) 6089.51,3196.1 ccw(c6093.51,3196.1) 6097.51,3196.1 cw(c6101.51,3196.1) 6105.51,3196.1 ccw(c6109.51,3196.1) 6113.51,3196.1 cw(c6117.51,3196.1) 6121.51,3196.1 ccw(c6125.51,3196.1) 6129.51,3196.1 cw(c6133.51,3196.1) 6137.51,3196.1 ccw(c6141.51,3196.1) 6145.51,3196.1 cw(c6149.51,3196.1) 6153.51,3196.1 ccw(c6157.51,3196.1) 6161.51,3196.1 cw(c6165.51,3196.1) 6169.51,3196.1 ccw(c6173.51,3196.1) 6177.51,3196.1 cw(c6181.51,3196.1) 6185.51,3196.1 ccw(c6189.51,3196.1) 6193.51,3196.1 cw(c6197.51,3196.1) 6201.51,3196.1 ccw(c6205.51,3196.1) 6209.51,3196.1 cw(c6213.51,3196.1) 6217.51,3196.1 ccw(c6221.51,3196.1) 6225.51,3196.1 cw(c6229.51,3196.1) 6233.51,3196.1 ccw(c6237.51,3196.1) 6241.51,3196.1 cw(c6245.51,3196.1) 6249.51,3196.1 ccw(c6253.51,3196.1) 6257.51,3196.1 cw(c6261.51,3196.1) 6265.51,3196.1 ccw(c6269.51,3196.1) 6273.51,3196.1 cw(c6277.51,3196.1) 6281.51,3196.1 ccw(c6285.51,3196.1) 6289.51,3196.1 cw(c6293.51,3196.1) 6297.51,3196.1 ccw(c6301.51,3196.1) 6305.51,3196.1 cw(c6309.51,3196.1) 6313.51,3196.1 ccw(c6317.51,3196.1) 6321.51,3196.1 cw(c6325.51,3196.1) 6329.51,3196.1 ccw(c6333.51,3196.1) 6337.51,3196.1 6345.51,3196.1 ccw(c6349.51,3196.1) 6353.51,3196.1 cw(c6357.51,3196.1) 6361.51,3196.1 ccw(c6365.51,3196.1) 6369.51,3196.1 cw(c6373.51,3196.1) 6377.51,3196.1 ccw(c6381.51,3196.1) 6385.51,3196.1 cw(c6389.51,3196.1) 6393.51,3196.1 ccw(c6397.51,3196.1) 6401.51,3196.1 cw(c6405.51,3196.1) 6409.51,3196.1 ccw(c6413.51,3196.1) 6417.51,3196.1 cw(c6421.51,3196.1) 6425.51,3196.1 6440.2,3196.1 v1(6440.94,3196.85) ; Q3.R7@6377.95,2244.09 6377.95,2212.6 6385.7,2204.85 6486.3,2204.85 ccw(c6486.3,2208.85) 6490.3,2208.85 6490.3,2220.32 cw(c6494.3,2220.32) 6494.3,2224.32 cw(c6494.3,2220.32) 6498.3,2220.32 6498.3,2208.85 ccw(c6502.3,2208.85) 6502.3,2204.85 ccw(c6502.3,2208.85) 6506.3,2208.85 6506.3,2220.32 cw(c6510.3,2220.32) 6510.3,2224.32 cw(c6510.3,2220.32) 6514.3,2220.32 6514.3,2208.85 ccw(c6518.3,2208.85) 6518.3,2204.85 ccw(c6518.3,2208.85) 6522.3,2208.85 6522.3,2220.32 cw(c6526.3,2220.32) 6526.3,2224.32 cw(c6526.3,2220.32) 6530.3,2220.32 6530.3,2208.85 ccw(c6534.3,2208.85) 6534.3,2204.85 ccw(c6534.3,2208.85) 6538.3,2208.85 6538.3,2220.32 cw(c6542.3,2220.32) 6542.3,2224.32 cw(c6542.3,2220.32) 6546.3,2220.32 6546.3,2208.85 ccw(c6550.3,2208.85) 6550.3,2204.85 ccw(c6550.3,2208.85) 6554.3,2208.85 6554.3,2220.32 cw(c6558.3,2220.32) 6558.3,2224.32 cw(c6558.3,2220.32) 6562.3,2220.32 6562.3,2208.85 ccw(c6566.3,2208.85) 6566.3,2204.85 ccw(c6566.3,2208.85) 6570.3,2208.85 6570.3,2220.32 cw(c6574.3,2220.32) 6574.3,2224.32 cw(c6574.3,2220.32) 6578.3,2220.32 6578.3,2208.85 ccw(c6582.3,2208.85) 6582.3,2204.85 ccw(c6582.3,2208.85) 6586.3,2208.85 6586.3,2220.32 cw(c6590.3,2220.32) 6590.3,2224.32 cw(c6590.3,2220.32) 6594.3,2220.32 6594.3,2208.85 ccw(c6598.3,2208.85) 6598.3,2204.85 6622.17,2204.85 6677.17,2259.84 6696.9,2259.84 ccw(c6696.9,2262.84) 6699.9,2262.84 cw(c6706.9,2262.84) 6706.9,2269.84 cw(c6706.9,2262.84) 6713.9,2262.84 6713.9,2256.84 ccw(c6720.9,2256.84) 6720.9,2249.84 ccw(c6720.9,2256.84) 6727.9,2256.84 6727.9,2262.84 cw(c6734.9,2262.84) 6734.9,2269.84 cw(c6734.9,2262.84) 6741.9,2262.84 6741.9,2256.84 ccw(c6748.9,2256.84) 6748.9,2249.84 ccw(c6748.9,2256.84) 6755.9,2256.84 6755.9,2262.84 cw(c6762.9,2262.84) 6762.9,2269.84 cw(c6762.9,2262.84) 6769.9,2262.84 6769.9,2256.84 ccw(c6776.9,2256.84) 6776.9,2249.84 ccw(c6776.9,2256.84) 6783.9,2256.84 6783.9,2262.84 cw(c6790.9,2262.84) 6790.9,2269.84 cw(c6790.9,2262.84) 6797.9,2262.84 6797.9,2256.84 ccw(c6804.9,2256.84) 6804.9,2249.84 ccw(c6804.9,2256.84) 6811.9,2256.84 cw(c6814.9,2256.84) 6814.9,2259.84 6826.77,2259.84 ccw(c6826.77,2275.59) 6842.52,2275.59 6842.52,2283.46 ccw(c6826.77,2283.46) 6826.77,2299.21 6816.28,2299.21 cw(c6816.28,2306.21) 6809.28,2306.21 6809.28,2312.21 ccw(c6802.28,2312.21) 6802.28,2319.21 ccw(c6802.28,2312.21) 6795.28,2312.21 6795.28,2286.21 cw(c6788.28,2286.21) 6788.28,2279.21 cw(c6788.28,2286.21) 6781.28,2286.21 6781.28,2312.21 ccw(c6774.28,2312.21) 6774.28,2319.21 ccw(c6774.28,2312.21) 6767.28,2312.21 6767.28,2286.21 cw(c6760.28,2286.21) 6760.28,2279.21 cw(c6760.28,2286.21) 6753.28,2286.21 6753.28,2312.21 ccw(c6746.28,2312.21) 6746.28,2319.21 ccw(c6746.28,2312.21) 6739.28,2312.21 6739.28,2306.21 cw(c6732.28,2306.21) 6732.28,2299.21 v1(6716.54,2299.21) ; Q2.R7@6377.95,2929.13 6393.7,2944.88 6417.32,2944.88 v1(6456.69,2984.25)
  Bottom Layer w4: v1(5351.18,2826.77) 5358.74,2834.33 5358.74,2876.11 5366.68,2884.05 5366.68,2886.11 5391.17,2910.6 5391.17,2950.97 5408.71,2968.5 5419.42,2968.5 ccw(c5419.42,2975.5) 5426.42,2975.5 5426.42,2979.97 cw(c5433.42,2979.97) 5433.42,2986.97 cw(c5433.42,2979.97) 5440.42,2979.97 5440.42,2975.5 ccw(c5447.42,2975.5) 5447.42,2968.5 5461.42,2968.5 5477.17,2984.25 5525.17,2984.25 ccw(c5525.17,2988.25) 5529.17,2988.25 5529.17,2995.88 cw(c5533.17,2995.88) 5533.17,2999.88 cw(c5533.17,2995.88) 5537.17,2995.88 5537.17,2988.25 ccw(c5541.17,2988.25) 5541.17,2984.25 ccw(c5541.17,2988.25) 5545.17,2988.25 5545.17,2995.88 cw(c5549.17,2995.88) 5549.17,2999.88 cw(c5549.17,2995.88) 5553.17,2995.88 5553.17,2988.25 ccw(c5557.17,2988.25) 5557.17,2984.25 ccw(c5557.17,2988.25) 5561.17,2988.25 5561.17,2995.88 cw(c5565.17,2995.88) 5565.17,2999.88 cw(c5565.17,2995.88) 5569.17,2995.88 5569.17,2988.25 ccw(c5573.17,2988.25) 5573.17,2984.25 ccw(c5573.17,2988.25) 5577.17,2988.25 5577.17,2995.88 cw(c5581.17,2995.88) 5581.17,2999.88 cw(c5581.17,2995.88) 5585.17,2995.88 5585.17,2988.25 ccw(c5589.17,2988.25) 5589.17,2984.25 ccw(c5589.17,2988.25) 5593.17,2988.25 5593.17,2995.88 cw(c5597.17,2995.88) 5597.17,2999.88 cw(c5597.17,2995.88) 5601.17,2995.88 5601.17,2988.25 ccw(c5605.17,2988.25) 5605.17,2984.25 ccw(c5605.17,2988.25) 5609.17,2988.25 5609.17,2995.88 cw(c5613.17,2995.88) 5613.17,2999.88 cw(c5613.17,2995.88) 5617.17,2995.88 5617.17,2988.25 ccw(c5621.17,2988.25) 5621.17,2984.25 ccw(c5621.17,2988.25) 5625.17,2988.25 5625.17,2995.88 cw(c5629.17,2995.88) 5629.17,2999.88 cw(c5629.17,2995.88) 5633.17,2995.88 5633.17,2988.25 ccw(c5637.17,2988.25) 5637.17,2984.25 ccw(c5637.17,2988.25) 5641.17,2988.25 5641.17,2995.88 cw(c5645.17,2995.88) 5645.17,2999.88 cw(c5645.17,2995.88) 5649.17,2995.88 5649.17,2988.25 ccw(c5653.17,2988.25) 5653.17,2984.25 ccw(c5653.17,2988.25) 5657.17,2988.25 5657.17,2995.88 cw(c5661.17,2995.88) 5661.17,2999.88 cw(c5661.17,2995.88) 5665.17,2995.88 5665.17,2988.25 ccw(c5669.17,2988.25) 5669.17,2984.25 v1(5685.04,2984.25) ; v1(6440.94,3196.85) 6441.69,3196.1 6441.69,3001.66 6456.69,2986.66 v1(6456.69,2984.25) 6458.46,2984.25 6480.31,2962.4 6542.03,2962.4 6678.69,2825.75 6678.69,2360.69 6716.54,2322.83 ; v1(6716.54,2299.21) 6716.54,2322.83 ; R27.1@6751.38,2322.83 6716.54,2322.83